# Altium PCB LM709_pcb.PcbDoc
Units mil, origin at the board's own origin, x right, y up, seen from the top; angles counter-clockwise.
Board outline 2200 x 1800 mil, 2 copper layers (Top Layer, Bottom Layer); 38 components, 22 nets, 83 pads, 16 vias.
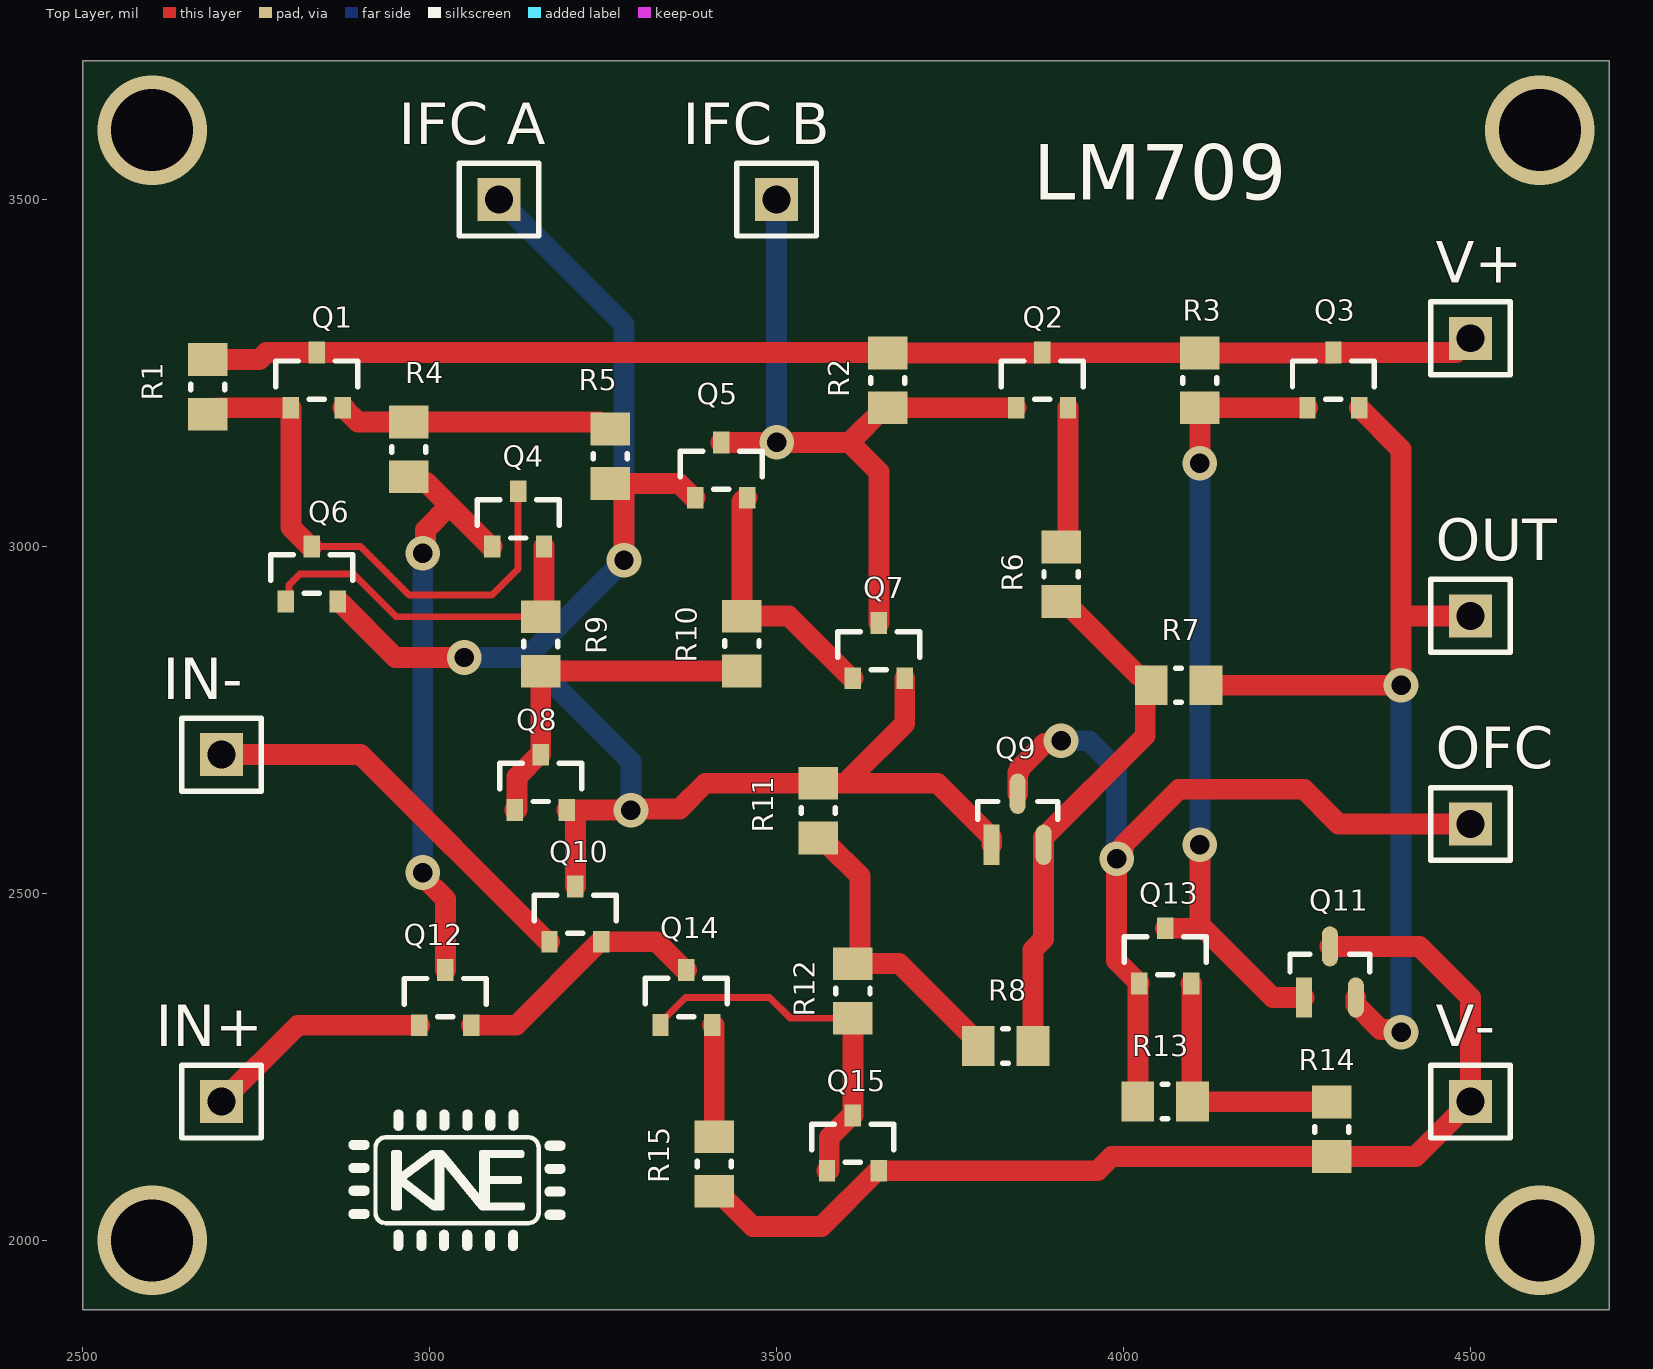
[diagram p0: Top Layer view]
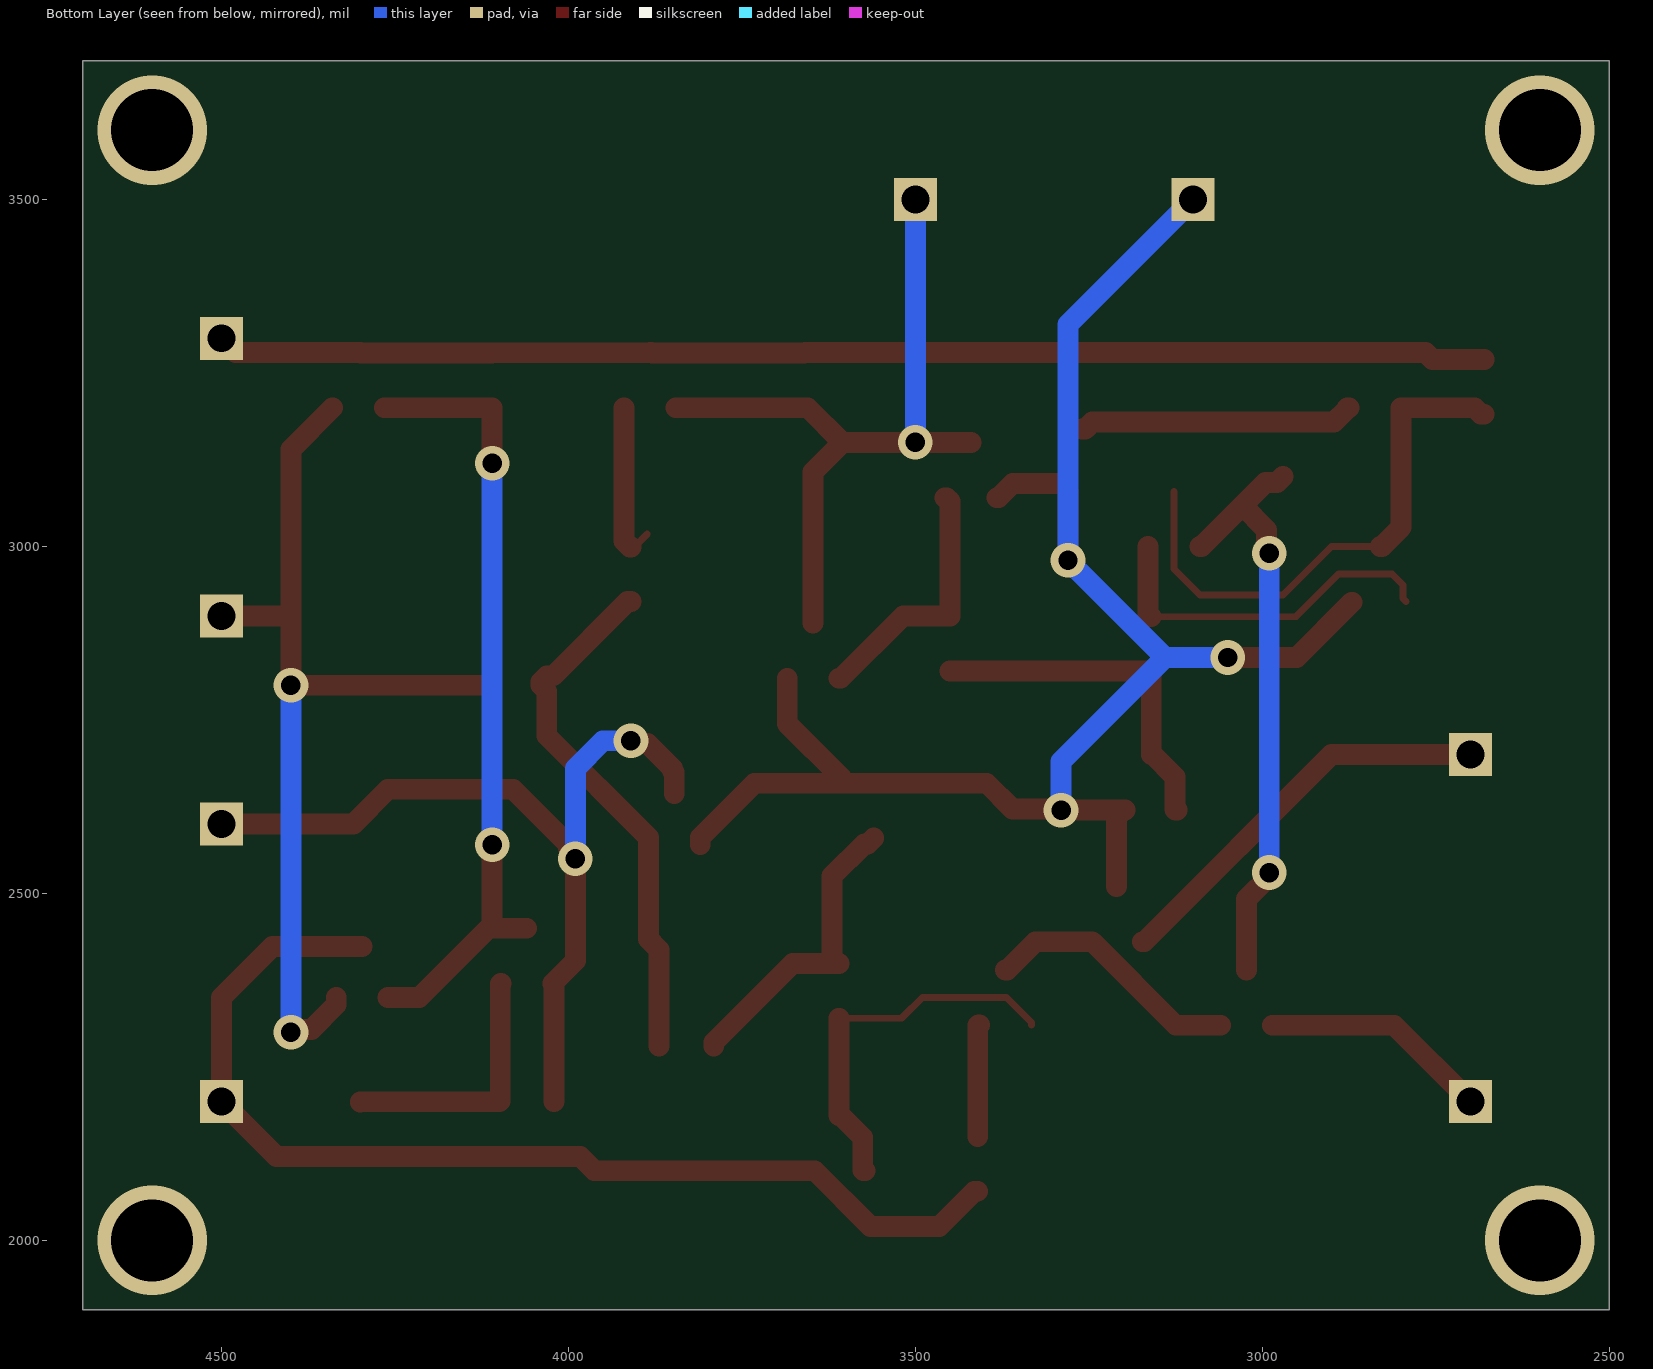
[diagram p1: Bottom Layer view, seen from below]
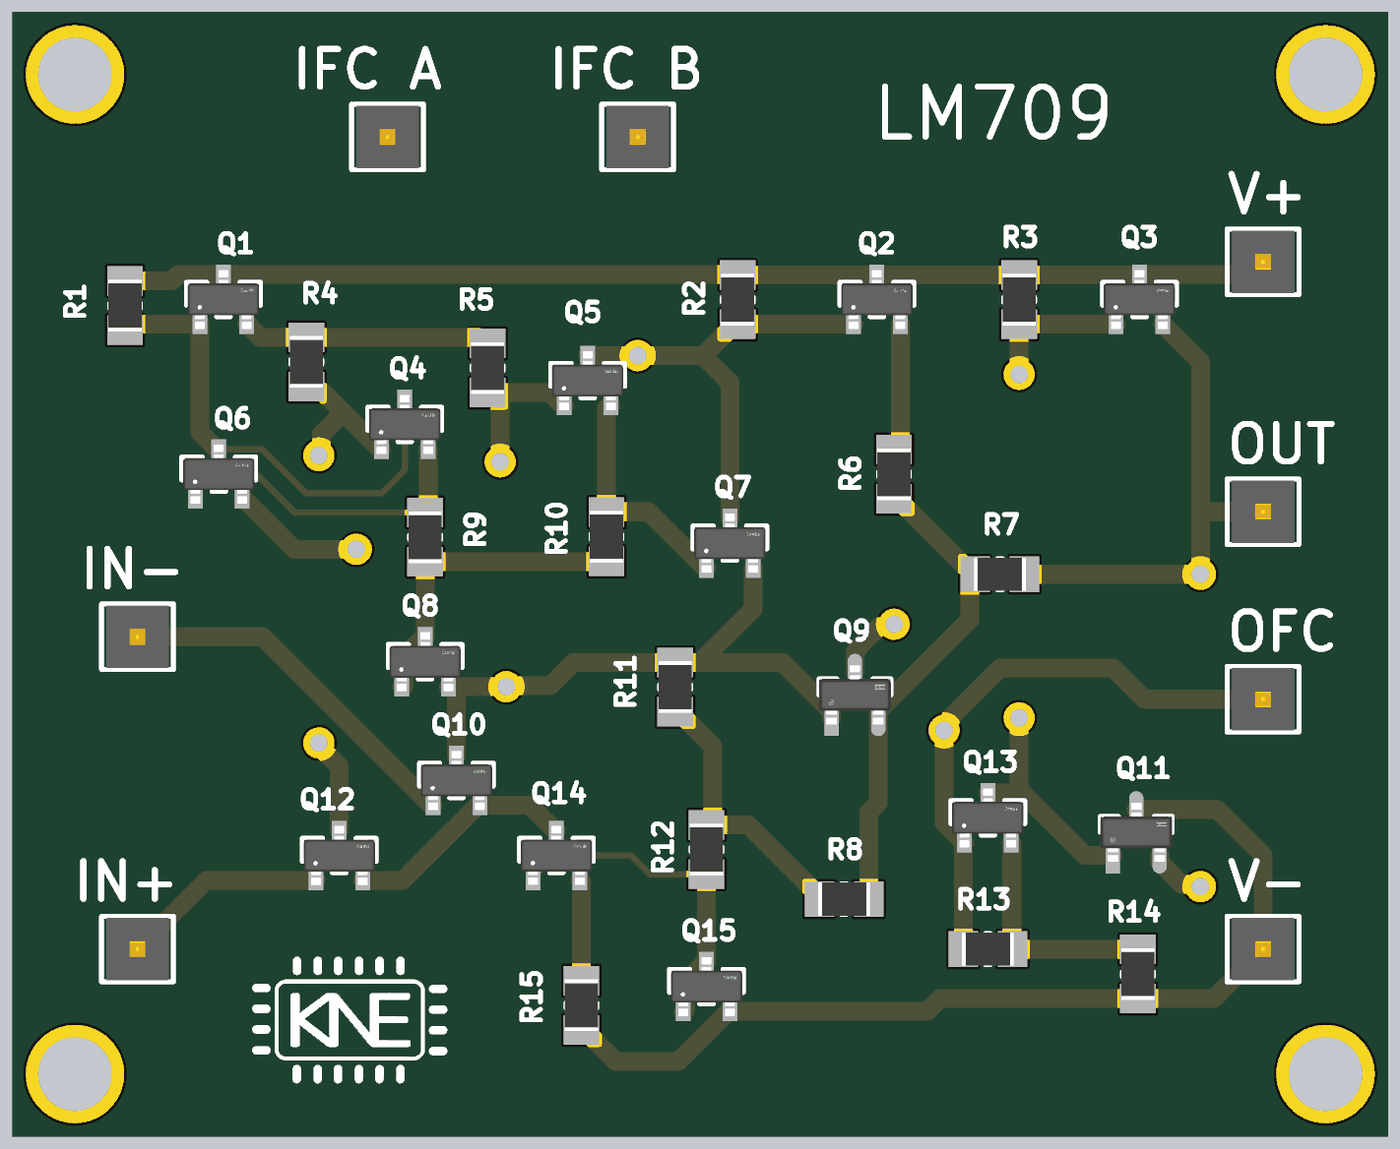
[diagram p2: 3D render of the assembled board from above, using the file's embedded part models]

## Layer stack, top to bottom
Top Solder: solder mask 0.4, Solder Resist, Dk 3.5
Top Layer: signal copper 1.4
Dielectric 1: dielectric 12.6, FR-4, Dk 4.8
Bottom Layer: signal copper 1.4
Bottom Solder: solder mask 0.4, Solder Resist, Dk 3.5

## Board outline
2500,3700 4700,3700 4700,1900 2500,1900

## Design rules (kind name [scope] priority, off if disabled: settings)
Clearance [All] p1: gap=10 ignorepadtopadclearanceinfootprint=FALSE except(0: Arc-Hole Track-Hole SMDPad-Hole THPad-Hole Via-Hole Fill-Hole Poly-Hole Region-Hole Text-Hole)
PolygonConnect [All] p1: connectstyle=Relief reliefconductorwidth=10 reliefentries=4 polygonreliefangle="90 Angle" airgapwidth=10
RoutingVias [All] p1: holewidth=28 width=50 viastyle="Through Hole" minholewidth=28 minwidth=50 maxholewidth=28 maxwidth=50
SolderMaskExpansion [All] p1: expansion=4 istentingtop=FALSE
Width [All] p1: maxlimit=30 minlimit=10 preferedwidth=10 minimp=50.000000 maximp=50.000000 favimp=50.000000
30 further rules are at their usual default settings.

## Components (designator, comment, footprint, x,y, rotation, side; value= is the part's Value field where it differs from the comment)
"IFC A" "TSW-101-07-F-S" FP-TSW-101-07-F-S-MFG 3100,3500 r0 top (schematic designator J1)
"IFC B" "TSW-101-07-F-S" FP-TSW-101-07-F-S-MFG 3500,3500 r0 top (schematic designator J2)
IN+ "TSW-101-07-F-S" FP-TSW-101-07-F-S-MFG 2700,2200 r0 top (schematic designator J7)
IN- "TSW-101-07-F-S" FP-TSW-101-07-F-S-MFG 2700,2700 r0 top (schematic designator J6)
OFC "TSW-101-07-F-S" FP-TSW-101-07-F-S-MFG 4500,2600 r0 top (schematic designator J5)
OUT "TSW-101-07-F-S" FP-TSW-101-07-F-S-MFG 4500,2900 r0 top (schematic designator J4)
Q1 "SS8050-G" FP-SS8050-G-MFG 2837.4,3239.76 r90 top
Q2 "SS8050-G" FP-SS8050-G-MFG 3882.6,3239.76 r90 top
Q3 "SS8050-G" FP-SS8050-G-MFG 4302.6,3239.76 r90 top
Q4 "SS8050-G" FP-SS8050-G-MFG 3127.4,3039.76 r90 top
Q5 "SS8050-G" FP-SS8050-G-MFG 3420,3110 r90 top
Q6 "SS8050-G" FP-SS8050-G-MFG 2830,2960.24 r90 top
Q7 "SS8050-G" FP-SS8050-G-MFG 3647.4,2849.76 r90 top
Q8 "SS8050-G" FP-SS8050-G-MFG 3160,2660 r90 top
Q9 "MMSS8550-H-TP" FP-SOT-23-IPC_B 3847.4,2606.82 r90 top
Q10 "SS8050-G" FP-SS8050-G-MFG 3210,2470 r90 top
Q11 "MMSS8550-H-TP" FP-SOT-23-IPC_B 4297.4,2386.82 r90 top
Q12 "SS8050-G" FP-SS8050-G-MFG 3022.6,2349.76 r90 top
Q13 "SS8050-G" FP-SS8050-G-MFG 4060,2410 r90 top
Q14 "SS8050-G" FP-SS8050-G-MFG 3370,2350 r90 top
Q15 "SS8050-G" FP-SS8050-G-MFG 3610,2140 r90 top
R1 "10k" RESC2013X60X35ML10T20 2680,3230 r90 top
R2 "10k" RESC2013X60X35ML10T20 3660,3239.37 r90 top
R3 "20k" RESC2013X60X35ML10T20 4110,3239.37 r90 top
R4 "25k" RESC2013X60X35ML10T20 2970,3140 r90 top
R5 "25k" RESC2013X60X35ML10T20 3260,3130 r90 top
R6 "1k" RESC2013X60X35ML10T20 3910,2960 r90 top
R7 "30k" RESC2013X60X35ML10T20 4079.37,2800 r180 top
R8 "10k" RESC2013X60X35ML10T20 3830,2280 r0 top
R9 "3k" RESC2013X60X35ML10T20 3160,2859.37 r90 top
R10 "3k" RESC2013X60X35ML10T20 3450,2860 r90 top
R11 "3.6k" RESC2013X60X35ML10T20 3560,2619.37 r90 top
R12 "10k" RESC2013X60X35ML10T20 3610,2359.37 r90 top
R13 "10k" RESC2013X60X35ML10T20 4060,2200 r180 top
R14 "75" RESC2013X60X35ML10T20 4300,2160 r90 top
R15 "2.4k" RESC2013X60X35ML10T20 3410,2110 r270 top
V+ "TSW-101-07-F-S" FP-TSW-101-07-F-S-MFG 4500,3300 r0 top (schematic designator J3)
V- "TSW-101-07-F-S" FP-TSW-101-07-F-S-MFG 4500,2200 r0 top (schematic designator J8)

## Footprints (in the part's own frame and the unit in brackets; to place one, negate y for a bottom-side part, rotate by r counter-clockwise, add the part's x,y. Pads: shape width x height; smd on the part's side, far side on the other; paste and mask are expansions set on the pad)
FP-SOT-23-IPC_B [mm]
  rect 1.474x0.585 smd paste+0 mask+0: 1(-0.935,0.95)
  rrect100% 1.474x0.585 smd paste+0 mask+0: 2(-0.935,-0.95) 3(0.935,0)
  silkscreen extent 0,-1.46 0.65,1.46, body extent -1.92,-1.71 1.92,1.71, height 0.25
FP-SS8050-G-MFG [mm]
  rect 0.8x0.6 smd paste+0 mask+0: 1(-1.01,0.95) 2(-1.01,-0.95) 3(1.01,0)
  silkscreen extent -0.7,-1.5 0.7,1.5, body extent -1.51,-1.6 1.51,1.6, height 0.25
FP-TSW-101-07-F-S-MFG [mm]
  rect 1.57x1.57 hole 1.02 paste-1000 mask+0: 1(0,0)
  silkscreen extent -1.46,-1.34 1.46,1.34, body extent -1.56,-1.44 1.56,1.44, height 0.25
RESC2013X60X35ML10T20 [mm] "Chip Resistor, 2-Leads, Body 2.1x1.35mm, IPC Low Density"
  rect 1.2x1.45 smd: 1(-1,0) 2(1,0)
  silkscreen extent -0.1,-0.63 0.1,0.63, body extent -1.05,-0.68 1.05,0.67, height 0.6

## Part data
"IFC A" "IFC B" IN+ IN- OFC OUT V+ V-: library part CMP-02766-001403-1, "CONN HEADER VERT 1POS", Flammability Rating="UL94 V-0", Insulation Color=Black, Max Operating Temperature=125°C, Min Operating Temperature=-55°C, Connector Type=Header, Contact Finish - Mating=GOLD, Contact Material=Bronze, Contact Plating=Gold, Contact Shape=Square, Contact Type="Male Pin", Fastening Type=Pull, Gender=Male, Insulation Material=PBT, Mount="Through Hole", Number of Contacts=1, Number of Positions=1, Number of Rows=1, Packaging=Bulk, Radiation Hardening=No, REACH SVHC="No SVHC", RoHS Compliant=Yes, Series=TSW, Termination=Solder
Q1 Q2 Q3 Q4 Q5 Q6 Q7 Q8 Q10 Q12 Q13 Q14 Q15: library part CMP-20235-000001-1, "NPN TRANSISTOR 1.5A 40V SOT-23 R", Case/Package=TO-236-3, Collector Emitter Breakdown Voltage=25V, Collector Emitter Voltage (VCEO)=400mV, Max Collector Current=1.5A, Max Power Dissipation=300mW, Transition Frequency=100MHz, Max Breakdown Voltage=25V, Mount="Surface Mount", Packaging="Tape and Reel", RoHS Compliant=Yes
Q9 Q11: library part CMP-56214-000002-1, "TRANS PNP 25V 1.5A SOT23", Case/Package=SOT-23, Collector Base Voltage (VCBO)=40V, Collector Emitter Breakdown Voltage=25V, Collector Emitter Saturation Voltage=500mV, Emitter Base Voltage (VEBO)=1.6V, Max Collector Current=1.5A, Max Operating Temperature=150°C, Max Power Dissipation=625mW, Min Operating Temperature=-55°C, Package Quantity=1, Transition Frequency=100MHz, Collector Emitter Voltage (VCEO)=500mV, Element Configuration=Single, Gain Bandwidth Product=100MHz, hFE Min=40, Lead Free="Lead Free", Max Breakdown Voltage=25V, Mount="Surface Mount", Packaging="Tape and Reel", Polarity=PNP
R1 R2 R3 R4 R5 R6 R7 R8 R9 R10 R11 R12 R13 R14 R15: library part CMP-2100-03671-1, "Chip Resistor, 1 KOhm, +/- 1%, 125 mW, -55 to 155 degC, 0805 (2012 Metric), RoHS, Tape and Reel", Case Code (Imperial)=0805, Case Code (Metric)=2012, Manufacturer=Yageo, Max Operating Temperature=155degC, Max Power Dissipation=125mW, Min Operating Temperature=-55degC, Package Description="2-Pin Surface Mounted Device, Body 2 x 1.25 mm", Package Quantity=1, Resistance=1KOhm, Temperature Coefficient=100ppm/degreesC, Tolerance=1%, Voltage Rating=150V, Case/Package=0805, Composition=ThickFilm, Datasheet URL=http://www.yageo.com/NewPortal/yageodocoutput?fileName=/pdf/R-Chip/PYu-RC_Group_51_RoHS_L_5.pdf, Datasheet Version="Rev. 5, 10/2016", Depth=1.25mm, Height=0.024inch, Lead Free=LeadFree, Length=0.079inch, Manufacturer URL=http://www.yageo.com/, Military Standard=Not, Number of Pins=2, Number of Terminations=2, Package Reference=0805, Packaging=TapeandReel, Power Rating=125mW, REACH SVHC=Unknown, RoHSCompliant=true, Termination=SMD/SMT, Voltage Rating (DC)=150V, Width=0.049inch

## Via types
v1: diameter 50, hole 28, Top Layer to Bottom Layer, 12 vias
v2: diameter 157.48, hole 118.11, Top Layer to Bottom Layer, 4 vias

## Nets (pads, with @x,y where several pads share a name; then routed paths per layer and width w, separated by ;. In a path a pad name is that pad's centre, name@x,y a point inside that pad or via, vN(x,y) a via of type N, cw(c..) or ccw(c..) an arc to the next point about the centre after c; other vN are vias at no path point)
FreqA: "IFC A.1" Q5.1 Q6.2 Q7.2 Q8.2 Q9.1 Q10.3 R5.1 R11.2 | length 2554
  Top Layer w30: Q6.2@2870.59,2919.72 2950.31,2840 v1(3050,2840) ; Q8.2 Q8.2@3199.84,2620.24 ; Q10.3 3210,2610.08 Q8.2@3199.84,2620.24 ; v1(3280,2980) 3280,3080.63 3290,3090.63 3359.76,3090.63 3380.16,3070.24 Q5.1 ; 3607.36,2667.36 3684.8,2744.8 Q7.2 ; Q9.1 3810,2580.53 3731.79,2658.74 3607.36,2658.74 R11.2 3397.09,2658.74 3360,2621.65 3291.65,2621.65 v1(3290,2620) 3289.88,2620.12 3199.96,2620.12 Q8.2@3199.84,2620.24
  Bottom Layer w30: v1(3050,2840) 3140,2840 ; 3100,3500 3280,3320 v1(3280,2980) 3140,2840 ; v1(3290,2620) 3290,2690 3140,2840
FreqB: "IFC B.1" Q2.1 Q5.3 Q7.3 R2.1 | length 1073.9
  Top Layer w30: Q5.3 3604.84,3149.76 ; Q7.3 3647.4,3107.2 3604.84,3149.76 ; Q2.1 R2.1 3655.08,3200 3604.84,3149.76
  Bottom Layer w30: v1(3500,3150) 3500,3500
FreqO: OFC.1 Q9.3 Q13.1 R13.2 | length 1280.1
  Top Layer w30: Q9.3 3847.4,2674.17 3850,2676.77 3850,2680 3886.17,2716.17 3906.17,2716.17 v1(3910,2720) ; R13.2 Q13.1@4020.63,2368.27 ; Q13.1 3990,2402.83 3990,2555.41 4000,2565.41 4000,2570 4080,2650 4260,2650 4310,2600 OFC.1
  Bottom Layer w30: v1(3910,2720) 3950,2720 3990,2680 v1(3990,2550)
IN+: IN+.1 Q12.1 | length 330.8
  Top Layer w30: IN+.1 2810,2310 Q12.1
IN-: IN-.1 Q10.1 | length 584.3
  Top Layer w30: IN-.1 2900.39,2700 3170.16,2430.24 Q10.1
NetQ1_1: Q1.1 Q4.3 Q6.3 R1.1 | length 791.8
  Top Layer w10: Q6.3 2900,3000 2970,2930 3090,2930 3127.4,2967.4 Q4.3
  Top Layer w30: R1.1 2684.92,3190.63 2694.29,3200 Q1.1 2800,3027.56 2827.56,3000 Q6.3
NetQ1_2: Q1.2 R4.2 R5.2 | length 398.7
  Top Layer w30: Q1.2 2877.24,3200 2877.99,3199.25 2877.99,3197.83 2896.46,3179.37 R4.2 3245.08,3179.37 3255.08,3169.37 R5.2
NetQ2_2: Q2.2 R6.2 | length 236.8
  Top Layer w10: R6.2@3886.46,3017.99 3905.08,2999.37 R6.2
  Top Layer w30: R6.2 3911.38,2999.37 3920,3007.99 Q2.2
NetQ3_1: Q3.1 Q11.1 Q13.3 R3.1 | length 1149
  Top Layer w30: Q13.3 4115.38,2449.76 ; v1(4110,2570) 4110,2455.15 4115.38,2449.76 ; v1(4110,3120) R3.1 Q3.1 ; Q11.1 4215.15,2350 4115.38,2449.76
  Bottom Layer w30: v1(4110,2570) v1(4110,3120)
NetQ4_1: Q4.1 Q12.3 R4.1 | length 860.5
  Top Layer w30: R4.1 2978.62,3092.01 2995.55,3092.01 3028.78,3058.78 ; v1(2990,2530) 2990,2524.59 3022.6,2491.99 Q12.3 ; v1(2990,2990) 2993.83,2993.83 2993.83,3023.83 3028.78,3058.78 ; Q4.1 3087.56,3000 3028.78,3058.78
  Bottom Layer w30: v1(2990,2530) v1(2990,2990)
NetQ4_2: Q4.2 Q6.1 R9.2 | length 518.8
  Top Layer w10: Q6.1 2797.3,2925.18 2797.3,2944.54 2812.76,2960 2890,2960 2951.26,2898.74 R9.2@3155.08,2898.74
  Top Layer w30: R9.2 3164.8,2903.54 Q4.2
NetQ5_2: Q5.2 Q7.1 R10.2 | length 372.9
  Top Layer w30: Q5.2 3454.96,3070.24 3450,3065.28 R10.2 3450.63,2900 3517.56,2900 3607.56,2810 Q7.1
NetQ8_1: Q8.1 Q8.3 R9.1 R10.1 | length 508.4
  Top Layer w30: Q8.1 3125.04,2620.24 3125.79,2620.98 3125.79,2667.99 3157.56,2699.76 Q8.3 R9.1 3160.31,2820.31 3449.68,2820.31 R10.1
NetQ9_2: Q9.2 R6.1 R7.2 R8.2 | length 788.6
  Top Layer w10: R6.1 R6.1@3920.63,2910
  Top Layer w30: R8.2 3869.37,2418.79 3884.8,2434.22 Q9.2 3884.8,2580.53 4031.38,2727.11 4031.38,2791.38 R7.2 4040,2804.92 4031.38,2813.54 4022.01,2813.54 3914.92,2920.63 R6.1
NetQ10_2: Q10.2 Q12.2 Q14.3 | length 376.6
  Top Layer w30: Q12.2 3124.72,2310 3244.96,2430.24 Q10.2 3327.09,2430.24 3367.56,2389.76 Q14.3
NetQ13_2: Q13.2 R13.1 R14.2 | length 377
  Top Layer w10: R14.2@4295.08,2199.37 R14.2
  Top Layer w30: Q13.2 4097.64,2370.24 4098.39,2369.49 4098.39,2200.98 R13.1 4099.69,2199.69 4299.69,2199.69 R14.2
NetQ14_1: Q14.1 Q15.1 Q15.3 R12.1 | length 546.7
  Top Layer w10: Q14.1 3332.6,2314.17 3368.43,2350 3490,2350 3520,2320 R12.1
  Top Layer w30: Q15.1 3575.04,2100.24 3575.79,2100.98 3575.79,2147.99 3607.56,2179.76 Q15.3 R12.1
NetQ14_2: Q14.2 R15.1 | length 163
  Top Layer w30: Q14.2 3409.25,2310.24 3410,2309.49 R15.1
NetR8_1: R8.1 R11.1 R12.2 | length 446.6
  Top Layer w30: R11.1 3568.62,2571.38 3573.54,2571.38 3620,2524.92 3620,2407.36 3611.38,2398.74 R12.2 3676.81,2398.74 3790.63,2284.92 R8.1
OUT: OUT.1 Q3.2 Q11.2 R7.1 | length 1398.2
  Top Layer w30: R7.1 v1(4400,2800) 4400,2900 ; Q11.2 4334.8,2339.47 4370.44,2303.83 4396.17,2303.83 v1(4400,2300) ; Q3.2 4400,3140 4400,2900 ; OUT.1 4400,2900
  Bottom Layer w30: v1(4400,2300) v1(4400,2800)
V+: Q1.3 Q2.3 Q3.3 R1.2 R2.2 R3.2 V+.1 | length 1832.9
  Top Layer w30: R1.2 2754.49,3269.37 2764.65,3279.53 R2.2@3659.21,3279.53 ; R2.2 3879.37,3278.74 3880.16,3279.53 Q2.3 3882.99,3279.13 4109.61,3279.13 R3.2 4299.37,3278.74 4300.16,3279.53 Q3.3 4479.53,3279.53 V+.1
V-: Q11.3 Q15.2 R14.1 R15.2 V-.1 | length 1568.6
  Top Layer w30: R15.2 3414.92,2070.63 3465.55,2020 3564.72,2020 3644.96,2100.24 Q15.2 3962.64,2100.24 3983.03,2120.63 R14.1 4420.63,2120.63 V-.1 4500,2350 4426.36,2423.64 Q11.3
copper on no net:
  other v2: 2600,2000 4600,2000 2600,3600 4600,3600

## Silkscreen, mask and mechanical layers (free items; w line width, h text height)
Top Overlay:
  drawing of 22 lines, arcs and shapes, not listed
  text "LM709" at 3870,3500 h80